# EAGLE board alim (EAGLE 4.16)
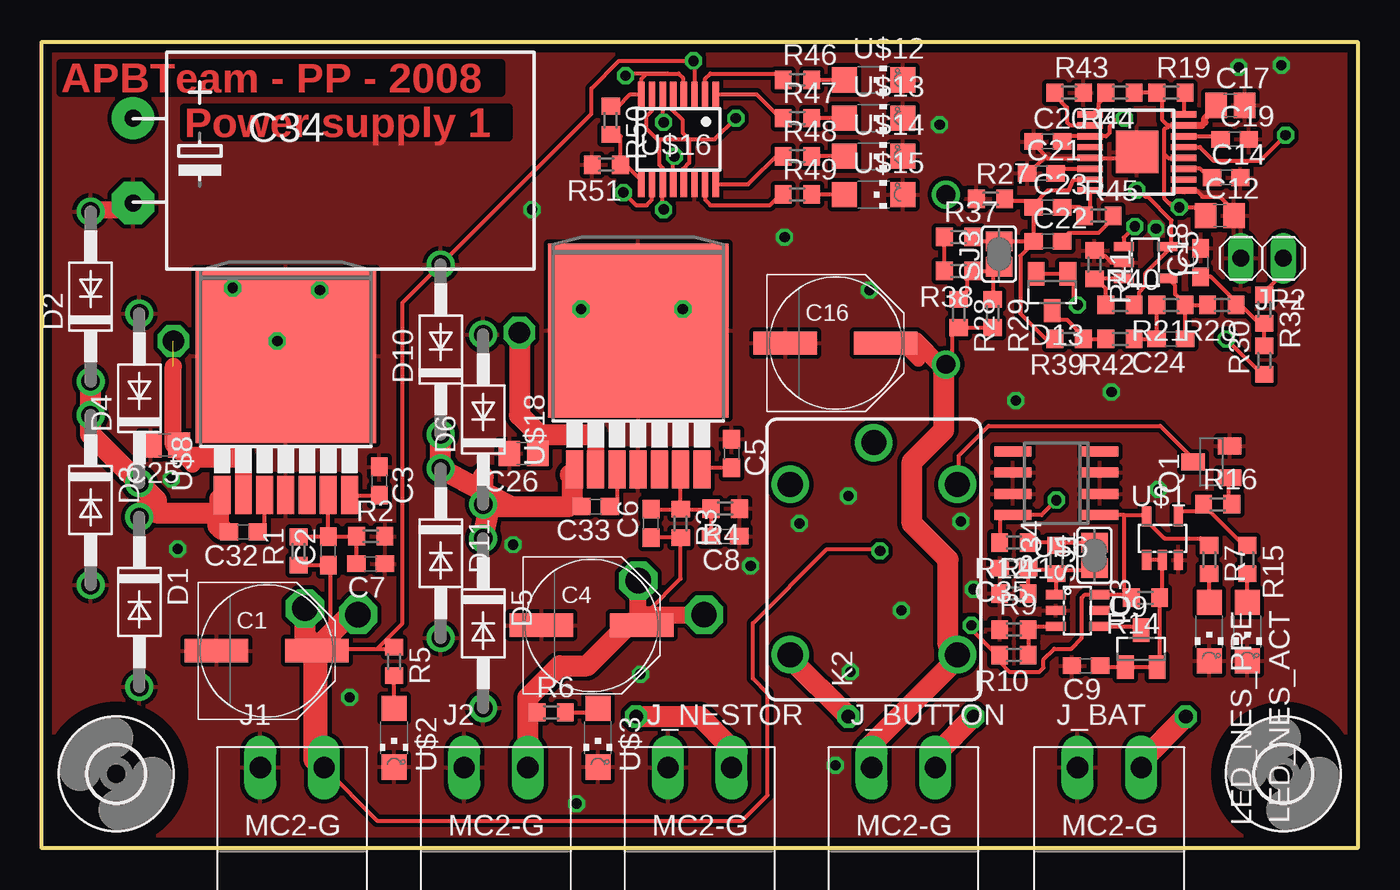
[diagram p0: board, top side]
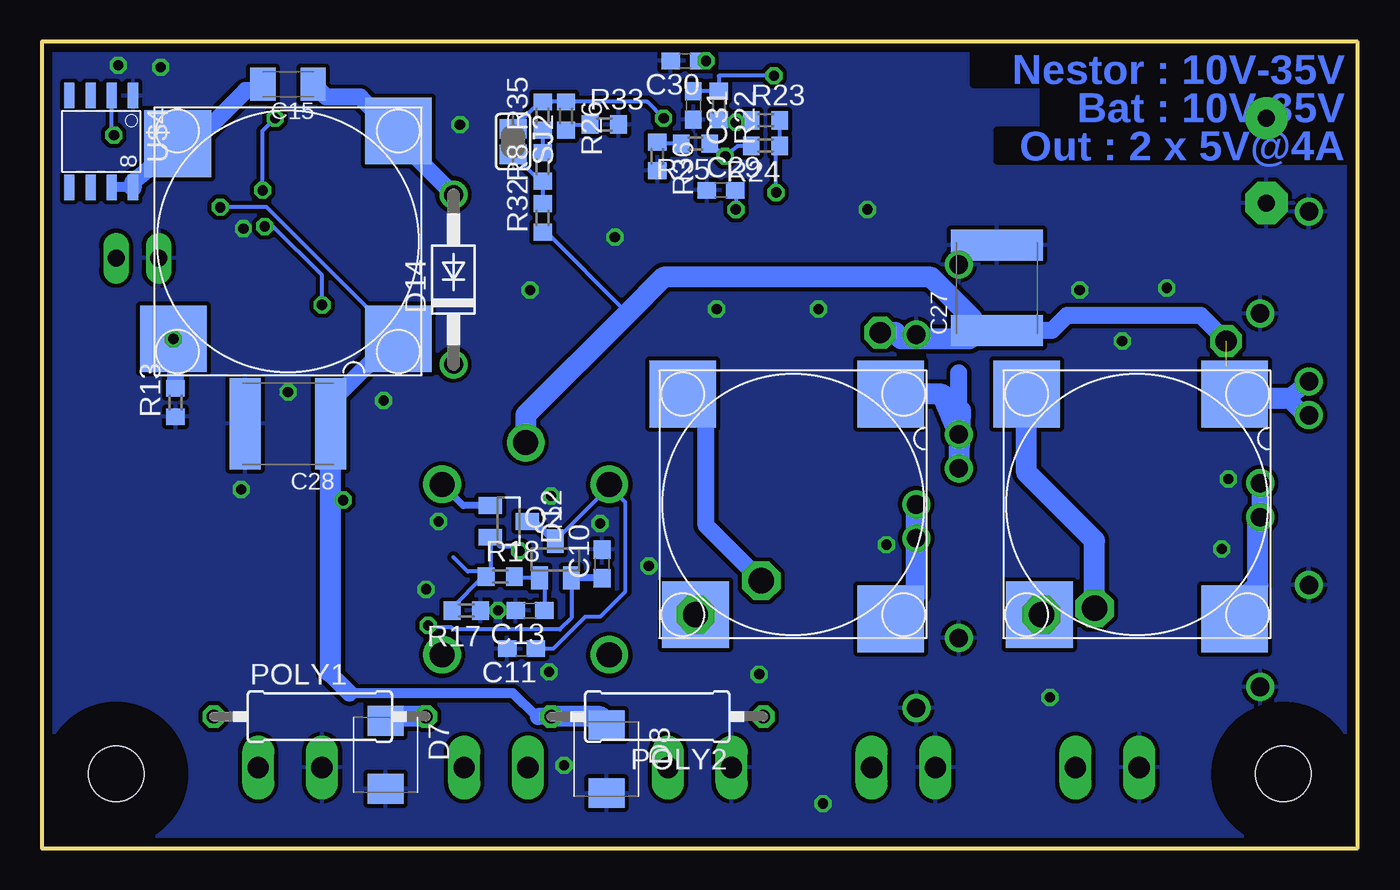
[diagram p1: board, bottom side, seen from below]

Size 78.74 x 48.26 mm. Coordinates in mm from the lower left corner, seen from the top.
Outline: 78.74,0 0,0 0,48.26 78.74,48.26 78.74,0
Copper layers (1*16): Top 0.035mm / dielectric 1.5mm / Bottom 0.035mm
Design rules "10mils": minimum track width 10mil, minimum drill 24mil, track to track 10mil, track to pad 10mil, pad to pad 10mil, via to via 10mil, smd to smd 10mil, copper to edge 20mil, drill to drill 8mil, minimum pad ring 10mil, minimum via ring 8mil, stop-mask expansion 0mil, vias tented up to drill 0mil, thermal gap 10mil

## Footprints (pad centres in the part's own frame; a part is rotated, then mirrored left to right if it is on the bottom)
PANASONIC_E = smd 3.8 x 1.4: + 3,0; - -3,0
C0603 = smd 1.1 x 1: 1 -0.85,0; 2 0.85,0
C0805 = smd 1.3 x 1.5: 1 -0.85,0; 2 0.85,0
C1206K = smd 1.5 x 2: 1 -1.5,0; 2 1.5,0
C2220K = smd 1.85 x 5.5: 1 -2.55,0; 2 2.55,0
E5-13_RADIAL = drill 1.016 pad 2.54 round: + -2.54,0 | drill 1.016 pad 2.54 octagon: - 2.54,0
DO41-10 = drill 1.118 round: A 5.08,0; C -5.08,0
SMBJ = smd 1.78 x 2.16: A 2.04,0; C -2.03,0
SOT23 = smd 1 x 1.4: 1 -0.95,-1.1; 2 0.95,-1.1; 3 0,1.1
3,3 = hole 3.3: 0,0
SOT23-6 = smd 0.55 x 1.2: 1 -0.95,-1.3; 2 0,-1.3; 3 0.95,-1.3; 4 0.95,1.3; 5 0,1.303; 6 -0.95,1.3
SOT23-5 = smd 0.55 x 1.2: 1 -0.95,-1.3; 2 0,-1.3; 3 0.95,-1.3; 4 0.95,1.3; 5 -0.95,1.3
MC2-G = drill 1.27 long: 1 -1.905,0; 2 1.905,0
1X02 = drill 1.016 long: 1 -1.27,0; 2 1.27,0
CQ1 = drill 1.5 round: 1 4.5,-5; 2 4.5,5; C 7,0; NC -5.7,-5; NO -5.7,5
CHIPLED_1206 = smd 1.5 x 1.5: A 0,-1.75; C 0,1.75
0309/12 = drill 0.813 octagon: 1 -6.35,0; 2 6.35,0
SOT23-BEC = smd 1 x 1.4: B -0.95,-1.1; C 0,1.1; E 0.95,-1.1
R0603 = smd 1 x 1.1: 1 -0.85,0; 2 0.85,0
SJ = smd 1.168 x 1.6: 1 -0.762,0; 2 0.762,0
SO-8 = smd 1.524 x 0.61: 1 -2.743,1.27; 2 -2.743,0; 3 -2.743,-1.27; 4 -2.743,-2.54; 5 2.743,-2.54; 6 2.743,-1.27; 7 2.743,0; 8 2.743,1.27
HM76_40 = smd 3.988 x 3.988: P$1 -6.604,5.842; P$2 6.604,-5.842; P$3 -6.604,-6.604; P$4 6.858,5.842
SO08 = smd 0.6 x 2.2: 1 -1.905,-2.6; 2 -0.635,-2.6; 3 0.635,-2.6; 4 1.905,-2.6; 5 1.905,2.6; 6 0.635,2.6; 7 -0.635,2.6; 8 -1.905,2.6
PDSO16 = smd 0.381 x 1.524: P$1 -2.25,-2.8; P$2 -1.6,-2.8; P$3 -0.95,-2.8; P$4 -0.3,-2.8; P$5 0.35,-2.8; P$6 1,-2.8; P$7 1.65,-2.8; P$8 2.3,-2.8; P$9 2.3,2.8; P$10 1.65,2.8; P$11 1,2.8; P$12 0.35,2.8; P$13 -0.3,2.8; P$14 -0.95,2.8; P$15 -1.6,2.8; P$16 -2.25,2.8 | smd 2.54 x 2.54: P$17 0,0
TO263-7 = smd 1.016 x 2.286: 1 -3.81,-5.791; 2 -2.54,-5.791; 3 -1.27,-5.791; 4 0,-5.791; 5 1.27,-5.791; 6 2.54,-5.791; 7 3.81,-5.791 | smd 10.8 x 10.41: 8 0,2.54
QSOP16 = smd 0.381 x 1.524: 1 -2.223,-2.69; 2 -1.587,-2.69; 3 -0.953,-2.69; 4 -0.318,-2.69; 5 0.318,-2.69; 6 0.953,-2.69; 7 1.587,-2.69; 8 2.223,-2.69; 9 2.223,2.69; 10 1.587,2.69; 11 0.953,2.69; 12 0.318,2.69; 13 -0.318,2.69; 14 -0.953,2.69; 15 -1.587,2.69; 16 -2.223,2.69

## Placement (x,y rotation side)
C1  47µ  [PANASONIC_E]  13.46,11.81 0 top
C2  [C0603]  17.14,17.78 90 top
C3  100n  [C0603]  20.19,21.97 270 top
C4  47µ  [PANASONIC_E]  32.89,13.34 0 top
C5  100n  [C0603]  41.27,23.62 270 top
C6  [C0603]  36.45,19.43 90 top
C7  [C0603]  19.68,17.02 180 top
C8  [C0603]  40.89,18.67 180 top
C9  100n  [C0603]  62.48,10.92 180 top
C10  1µ  [C0603]  45.21,17.02 90 bottom
C11  1µ  [C0603]  50.04,11.94 180 bottom
C12  100n/50V  [C0805]  70.48,37.85 0 top
C13  1µ  [C0603]  49.53,14.22 180 bottom
C14  1µ  [C0603]  70.87,40.13 0 top
C15  1µ  [C1206K]  64.01,45.72 180 bottom
C16  22µ/50V  [PANASONIC_E]  47.5,30.23 0 top
C17  100n/50V  [C0805]  71.12,44.45 0 top
C18  100n  [C0603]  69.34,35.05 90 top
C19  100n  [C0603]  71.37,42.42 0 top
C20  100n  [C0603]  60.2,42.29 0 top
C21  10n  [C0603]  59.82,40.39 0 top
C22  200p  [C0603]  60.2,36.32 0 top
C23  20p  [C0603]  60.2,38.35 0 top
C24  22p  [C0603]  67.56,30.48 180 top
C25  100n/50V  [C0805]  7.37,24.13 180 top
C26  100n/50V  [C0805]  28.83,23.62 180 top
C27  10µ/50V  [C2220K]  21.59,33.53 90 bottom
C28  10µ/50V  [C2220K]  64.01,25.4 180 bottom
C29  100n  [C0603]  38.1,39.37 0 bottom
C30  100n  [C0603]  40.26,47.12 180 bottom
C31  100n  [C0603]  39.75,44.45 270 bottom
C32  100n  [C0603]  12.06,18.92 180 top
C33  100n  [C0603]  33.15,20.45 180 top
C34  1000µF  [E5-13_RADIAL]  5.46,41.15 270 top
C35  100n  [C0603]  58.17,16.76 180 top
D1  1N5819  [DO41-10]  5.84,14.73 270 top
D2  1N5819  [DO41-10]  2.92,33.02 90 top
D3  1N5819  [DO41-10]  2.92,20.83 270 top
D4  1N5819  [DO41-10]  5.84,26.92 90 top
D5  1N5819  [DO41-10]  26.42,13.46 270 top
D6  1N5819  [DO41-10]  26.42,25.65 90 top
D7  [SMBJ]  58.17,5.59 270 bottom
D8  [SMBJ]  44.96,5.33 270 bottom
D9  BAS70-05  [SOT23]  65.79,11.94 0 top
D10  1N5819  [DO41-10]  23.88,29.84 90 top
D11  1N5819  [DO41-10]  23.88,17.65 270 top
D12  BAS70-05  [SOT23]  50.8,19.56 270 bottom
D13  BAS70-05  [SOT23]  60.45,33.27 180 top
D14  1N5819  [DO41-10]  54.1,34.04 90 bottom
H1  MOUNT-HOLE3.3  [3,3]  4.45,4.45 90 top
H2  MOUNT-HOLE3.3  [3,3]  74.3,4.45 90 top
IC3  LM331DBV  [SOT23-6]  61.98,14.22 270 top
IC5  AD8515RT  [SOT23-5]  66.04,35.05 270 top
J1  MC2-G  [MC2-G]  14.99,4.83 0 top
J2  MC2-G  [MC2-G]  27.18,4.83 0 top
J_BAT  MC2-G  [MC2-G]  63.88,4.83 0 top
J_BUTTON  MC2-G  [MC2-G]  51.56,4.83 0 top
J_NESTOR  MC2-G  [MC2-G]  39.37,4.83 0 top
JP2  [1X02]  73.03,35.31 180 top
K2  CQ1-12V  [CQ1]  49.78,17.27 90 top
LED_NES_ACT  [CHIPLED_1206]  72.14,12.95 180 top
LED_NES_PRE  [CHIPLED_1206]  69.85,12.95 180 top
POLY1  polyswitch 5A  [0309/12]  62.1,7.87 0 bottom
POLY2  polyswitch 5A  [0309/12]  41.91,7.87 180 bottom
Q1  BC850SMD  [SOT23-BEC]  69.98,23.11 90 top
Q2  BSS84  [SOT23]  48.01,17.27 0 bottom
R1  [R0603]  15.37,17.78 90 top
R2  [R0603]  19.68,18.67 0 top
R3  [R0603]  38.23,19.43 270 top
R4  [R0603]  40.89,20.32 180 top
R5  [R0603]  21.08,11.18 270 top
R6  [R0603]  30.48,8.13 0 top
R7  2,15k  [R0603]  69.85,17.27 270 top
R8  100k  [R0603]  48.77,40.77 90 bottom
R9  100k  [R0603]  58.17,13.08 0 top
R10  47k  [R0603]  58.17,11.56 180 top
R11  100k  [R0603]  58.17,15.24 0 top
R12  215k  [R0603]  58.17,18.29 180 top
R13  0.25  [R0603]  70.74,26.67 90 bottom
R14  100k  [R0603]  66.04,14.99 180 top
R15  2,15k  [R0603]  72.14,17.27 270 top
R16  [R0603]  70.36,20.57 0 top
R17  10k  [R0603]  53.34,14.22 180 bottom
R18  10k  [R0603]  51.31,16.26 0 bottom
R19  1k  [R0603]  67.56,45.21 0 top
R20  100k  [R0603]  70.61,32.51 180 top
R21  220k  [R0603]  67.56,32.51 180 top
R22  4.7k  [R0603]  38.23,44.45 270 bottom
R23  4.7k  [R0603]  35.43,43.56 0 bottom
R24  4.7K  [R0603]  35.43,42.04 180 bottom
R25  10k  [R0603]  39.62,42.16 180 bottom
R26  10k  [R0603]  47.37,43.81 270 bottom
R27  10k  [R0603]  56.77,38.86 0 top
R28  1M  [R0603]  54.86,32 270 top
R29  100k  [R0603]  56.9,32 270 top
R30  1k  [R0603]  73.15,29.21 90 top
R31  2,2k  [R0603]  73.15,32.26 270 top
R32  100k  [R0603]  48.77,37.72 90 bottom
R33  180  [R0603]  45.09,43.31 0 bottom
R34  330k  [R0603]  60.71,17.27 90 top
R35  10k  [R0603]  48.77,43.81 90 bottom
R36  100k  [R0603]  41.91,41.4 270 bottom
R37  100k  [R0603]  54.86,36.58 0 top
R38  10k  [R0603]  54.86,34.54 180 top
R39  1k  [R0603]  61.47,30.48 180 top
R40  1k  [R0603]  64.52,32.51 0 top
R41  1k  [R0603]  62.99,34.92 270 top
R42  100k  [R0603]  64.52,30.48 180 top
R43  66k  [R0603]  61.47,45.21 0 top
R44  32k  [R0603]  64.52,45.21 180 top
R45  100k  [R0603]  63.25,37.85 0 top
R46  2.2k  [R0603]  45.21,45.97 0 top
R47  2.2k  [R0603]  45.21,43.69 0 top
R48  2.2k  [R0603]  45.21,41.4 0 top
R49  2.2k  [R0603]  45.21,39.12 0 top
R50  22k  [R0603]  34.04,43.56 270 top
R51  215k  [R0603]  33.78,40.89 180 top
SJ1  [SJ]  62.99,17.53 90 top
SJ2  [SJ]  50.55,42.29 270 bottom
SJ3  [SJ]  57.28,35.56 90 top
U$1  1G08  [SOT23-5]  67.06,18.54 0 top
U$2  [CHIPLED_1206]  21.08,6.6 180 top
U$3  [CHIPLED_1206]  33.27,6.6 180 top
U$4  DUAL_N_MOS  [SO-8]  74.55,42.29 270 bottom
U$5  HM76_40022  [HM76_40]  13.21,20.57 270 bottom
U$6  LM2931D  [SO08]  60.71,21.84 90 top
U$7  TPS40057PWP  [PDSO16]  65.53,41.66 270 top
U$8  LM2678S  [TO263-7]  14.61,26.92 0 top
U$10  HM76_40022  [HM76_40]  33.78,20.57 270 bottom
U$11  HM76_40  [HM76_40]  64.01,36.32 180 bottom
U$12  [CHIPLED_1206]  49.78,45.97 270 top
U$13  [CHIPLED_1206]  49.78,43.69 270 top
U$14  [CHIPLED_1206]  49.78,41.4 270 top
U$15  [CHIPLED_1206]  49.78,39.12 270 top
U$16  MAX969  [QSOP16]  38.1,42.42 180 top
U$18  LM2678S  [TO263-7]  35.69,28.45 0 top

## Library data of the parts
C1-C35 POLY1 POLY2 R1-R51 = rcl
D1-D14 = diode
H1 H2 = holes
IC3 IC5 U$5-U$8 U$10 U$11 U$18 = robot
J1 J2 J_BAT J_BUTTON J_NESTOR = con-phoenix-381_l
JP2 = pinhead
K2 = relay
LED_NES_ACT LED_NES_PRE U$2 U$3 U$12-U$15 = led
Q1 = transistor-npn
Q2 = transistor-small-signal
SJ1-SJ3 = jumper
U$1 = little-logic
U$4 = transistor-fet
U$16 = maxim-7

## Nets
+5V: C10.1 IC3.6 Q2.2 R7.1 R10.2 R14.2 U$1.5 U$6.1
GND: C1.- C3.1 C4.- C5.1 C7.1 C8.1 C9.2 C10.2 C11.2 C12.2 C13.2 C14.2 C16.- C17.2 C18.2 C19.2 C20.1 C21.1 C25.2 C26.2 C27.2 C28.2 C29.1 C30.2 C31.2 C34.- C35.2 D1.A D2.A D3.A D4.A D5.A D6.A D7.A D8.A D10.A D11.A IC3.2 IC5.2 J1.1 J2.1 J_BAT.1 J_NESTOR.1 JP2.2 LED_NES_ACT.C LED_NES_PRE.C Q1.E R2.2 R4.1 R9.1 R11.1 R13.1 R17.1 R27.1 R33.2 R36.2 R41.1 R43.2 R51.2 U$1.3 U$2.C U$3.C U$4.1 U$6.2 U$6.3 U$6.6 U$6.7 U$7.P$5 U$7.P$9 U$7.P$17 U$8.4 U$8.8 U$12.C U$13.C U$14.C U$15.C U$16.14 U$18.4 U$18.8
N$1: C32.2 D1.C D2.C D3.C D4.C U$5.P$1 U$5.P$4 U$8.1
N$2: D12.1 K2.1 Q1.C
N$3: C2.2 C7.2 R1.2 R2.1 U$8.6
N$4: C6.2 C8.2 R3.1 R4.2 U$18.6
N$5: C5.2 U$18.7
N$6: C3.2 U$8.7
N$7: R15.1 R16.1 U$1.4
N$8: C33.2 D5.C D6.C D10.C D11.C U$10.P$1 U$10.P$4 U$18.1
N$9: R5.2 U$2.A
N$10: R6.2 U$3.A
N$11: LED_NES_PRE.A R7.2
N$12: J_BAT.2 POLY1.1
N$13: J_NESTOR.2 POLY2.1
N$14: IC3.3 R9.2 R10.1
N$15: C35.1 IC3.1 R11.2 R34.1 SJ1.1
N$16: C9.1 D9.1 D9.2 R14.1 U$1.1 U$1.2
N$17: D9.3 IC3.4
N$18: LED_NES_ACT.A R15.2
N$19: C13.1 Q2.1 R18.2
N$20: R22.2 R23.1 U$16.6
N$21: U$4.2 U$7.P$13
N$22: D7.C J_BUTTON.2 POLY1.2
N$23: Q1.B R16.2
N$24: C11.1 D12.3 K2.2 Q2.3
N$25: C19.1 U$7.P$14
N$26: C14.1 U$7.P$11
N$27: R46.1 U$16.2
N$28: R19.2 U$7.P$16
N$29: R23.2 R24.1 U$16.10
N$30: R24.2 R25.1 U$16.12
N$31: R50.2 R51.1 U$16.9
N$32: C29.2 R26.1 R35.2 SJ2.1 U$16.5 U$16.7 U$16.11 U$16.13
N$33: R8.2 R35.1
N$34: C15.2 U$4.7 U$4.8 U$11.P$2
N$35: C15.1 D14.A U$11.P$3
N$36: R28.1 R29.1 R38.1 SJ3.1
N$37: R47.1 U$16.1
N$40: R13.2 R30.1 U$11.P$4
N$41: C18.1 R20.1 R30.2 R31.2
N$42: R12.1 R34.2 SJ1.2
N$43: R8.1 R32.2 SJ2.2
N$44: C32.1 U$8.3
N$45: R26.2 R33.1
N$46: R25.2 R36.1
N$47: R37.1 R38.2
N$48: D13.1 D13.2 IC5.1
N$49: D13.3 R39.1 R42.2
N$50: C22.1 C23.1 R27.2 R37.2 R39.2 SJ3.2 U$7.P$7
N$51: C24.1 IC5.4 R20.2 R21.1
N$52: IC5.3 R40.1 R41.2
N$53: C24.2 R21.2 R42.1
N$54: JP2.1 R31.1
N$55: R48.1 U$16.16
N$56: C21.2 U$7.P$6
N$57: R43.1 U$7.P$2
N$58: R44.2 U$7.P$1
N$59: C23.2 R45.1 U$7.P$8
N$60: C22.2 R45.2
N$61: R49.1 U$16.15
N$62: R46.2 U$12.A
N$63: R47.2 U$13.A
N$64: R48.2 U$14.A
N$65: R49.2 U$15.A
N$66: C33.1 U$18.3
P5V_ALIM: C20.2 IC5.5 R40.2 U$7.P$3
P5V_DIRTY: C4.+ C6.1 J2.2 R3.2 R6.1 U$10.P$2 U$10.P$3
P5V_NUM: C1.+ C2.1 C30.1 D12.2 J1.2 R1.1 R5.1 R17.2 R18.1 U$5.P$2 U$5.P$3 U$16.3
V_ALIM: C25.1 C26.1 C27.1 K2.C R32.1 U$8.2 U$18.2
V_BAT: C16.+ D14.C J_BUTTON.1 K2.NC R28.2 R29.2
V_NESTOR: C12.1 C17.1 C28.1 D8.C K2.NO POLY2.2 R12.2 R19.1 R44.1 U$6.8 U$7.P$12 U$7.P$15 U$11.P$1
VREF_1V2: C31.1 R22.1 R50.1 U$16.4 U$16.8

## Tracks (layer width: path | path; a pad name or v marks a point on that pad's centre or on a via)
+5V  (via drill 0.61)
  Top 0.254: 64.77,19.94 66.17,19.94 66.11,19.88 U$1.5 66.11,19.75 66.04,19.68 67.18,18.54 69.34,18.54 69.76,18.12 R7.1 | IC3.6 65.09,15.17 65.19,15.07 R14.2 65.02,14.99 64.77,15.37 64.77,19.94 | IC3.6 63.69,15.17 | 64.77,19.94 U$6.1 | IC3.6 62.42,15.17 62.23,14.99 62.23,12.57 61.59,11.94 60.58,11.94 59.94,11.3 59.94,10.79 59.69,10.54 57.91,10.54 57.32,11.14 R10.2 57.15,11.56 55.63,13.08 v55.63,13.34
  Bottom 0.254: Q2.2 47.06,13.78 47.75,13.08 54.1,13.08 54.23,13.21 55.63,13.21 v55.63,13.34
  Bottom 0.406: 47.12,16.17 47.12,16.38 | 47.12,16.17 Q2.2 | C10.1 47.12,16.17
GND  (via drill 0.61)
  Top 0.254: 65.28,41.66 64.77,41.66 64.77,41.4 | U$7.P$17 65.18,41.31 U$7.P$5 60.17,41.31 60.07,41.4 | IC5.2 64.01,35.05 63.63,35.43 63.37,35.43 62.99,35.81 R41.1 | C20.1 59.35,42.12 60.07,41.4 | C21.1 59.35,40.6 59.31,40.64 60.07,41.4 | U$7.P$9 69.1,39.36 69.47,38.99 70.48,38.99 71.12,38.35 71.08,38.06 C12.2
  Top 1.016: 3.05,38.23 5.08,38.23 C34.-
  other vias: 74.17,46.86 66.67,37.08 55.75,15.49 51.44,14.22 45.34,19.43 48.26,21.08 47.5,4.95 32,2.67 18.41,9.02 11.43,33.53 16.64,33.4 14.1,30.35 32.26,32.26 38.35,32.26 7.75,22.1 8.13,17.91 42.42,16.89 64.01,27.3 66.8,21.46 58.29,26.8 54.99,19.56 53.72,43.31 44.45,36.58 29.34,38.23 71.63,46.74 49.53,33.4 35.81,10.41 28.19,18.16 48.39,10.54
  pour Bottom (isolate 0.254): 0.25,0.25 0.25,48.01 78.49,48.01 78.49,0.25
  pour Top (isolate 0.254): 0.51,0.51 0.51,47.75 78.23,47.75 78.23,0.51
N$1
  Top 0.254: 11.21,19.01 C32.2 11.21,18.63 10.79,19.05
  Top 1.016: U$8.1 10.72,21.13 10.54,20.95 10.54,20.07
  Top 1.27: 10.79,19.05 10.54,19.3 10.54,20.07 6.86,20.07 6.86,20.45 | D1.C 5.71,19.81 6.35,20.45 6.86,20.45 | 6.86,20.45 6.86,20.83 D4.C 2.92,24.77 D3.C D2.C
  Bottom 1.016: D3.C 3.3,26.04 | D2.C 4.19,26.92 3.3,26.04 | 3.3,26.04 3.17,26.16 | D1.C 5.84,19.68 | D1.C D4.C | D1.C 5.71,19.81
  Bottom 1.27: U$5.P$4 7.37,14.35 5.97,15.75 5.97,19.68 D1.C | 4.19,26.92 6.86,26.92 6.99,27.05 U$5.P$1
N$2
  Top 0.254: Q1.C 68.88,23.32 66.93,25.27 56.64,25.27 54.86,23.5 54.86,22.1 54.78,22.02 54.78,21.8 54.81,21.77 | 54.81,21.77 54.86,21.72 | K2.1 54.81,21.77
  Bottom 0.254: 54.82,21.76 54.86,21.72 | K2.1 54.82,21.76 | K2.1 54.81,21.77 54.82,21.76
  Bottom 0.406: D12.1 53.53,20.51 K2.1
N$3
  Top 0.254: C2.2 R1.2 | C2.2 U$8.6 | C2.2 18.88,18.63 18.92,18.67 | 18.92,18.67 R2.1 | C7.2 18.84,18.58 18.92,18.67
N$4
  Top 0.254: 38.23,20.32 38.23,20.45 38.06,20.28 C6.2 | 38.23,20.32 R3.1 39.97,20.28 40.01,20.32 R4.2 40.04,20.23 40.01,20.19 40.04,20.15 C8.2 | 38.23,20.32 U$18.6
N$5
  Top 0.254: U$18.7 39.45,22.66 39.37,22.73 39.41,22.77 C5.2
N$6
  Top 0.254: U$8.7 18.41,21.21 18.5,21.12 C3.2
N$7
  Top 0.254: U$1.4 68.01,20 68.2,20.19 69.09,20.19 69.47,20.57 R16.1 69.51,20.54 71.92,18.12 R15.1
N$8
  Top 0.254: 31.37,20.45 31.37,20.57 31.5,20.45 C33.2
  Top 1.016: U$18.1 31.88,22.61 31.62,22.35
  Top 1.27: 31.62,22.35 31.75,22.35 31.75,20.7 31.5,20.45 31.37,20.45 28.19,20.45 | D6.C 26.42,22.23 | 28.19,20.45 26.8,20.45 D5.C | 28.19,20.45 28.07,20.45 D11.C D10.C
  Bottom 1.016: 26.42,19.94 D5.C | U$10.P$4 28.7,13.72 | D10.C 23.88,28.45
  Bottom 1.27: 26.42,19.94 26.42,15.24 U$10.P$4 | D5.C D6.C | D11.C 23.75,26.16 23.88,26.29 24.89,27.18 | D10.C 24.89,27.18 | 24.89,27.18 U$10.P$1
N$9
  Top 0.254: R5.2 21.21,10.41 21.08,10.29 U$2.A
N$10
  Top 0.254: 33.27,8.13 U$3.A | R6.2 33.27,8.13 | 33.27,8.13 33.4,8
N$11
  Top 0.254: LED_NES_PRE.A R7.2
N$12
  Top 1.27: POLY1.1 65.79,5.21 J_BAT.2
N$13
  Top 1.27: POLY2.1 39.37,7.87 41.15,6.1 41.15,4.95 J_NESTOR.2
N$14
  Top 0.254: IC3.3 59.25,13.27 59.18,13.21 59.05,13.21 | R10.1 59.02,11.21 59.05,11.18 59.05,13.21 | 59.05,13.21 R9.2
N$15
  Top 0.254: 60.58,16.64 59.18,16.64 | 60.58,16.64 62.87,16.64 SJ1.1 | 59.18,16.64 C35.1 | R11.2 59.02,16.47 59.18,16.64 | IC3.1 60.65,15.17 60.58,15.24 60.71,15.37 R34.1 60.71,16.51 60.58,16.64
N$16
  Top 0.254: U$1.1 67.03,17.24 67.06,17.27 U$1.2 67.06,15.11 66.93,14.99 R14.1 66.89,11.01 66.74,10.86 D9.2 D9.1 | C9.1 63.37,10.92 63.46,10.84 | 63.46,10.84 D9.1 | D9.1 64.84,10.86 64.77,10.92 64.69,10.84 63.46,10.84
N$17
  Top 0.254: D9.3 65.79,12.95 65.47,13.27 IC3.4
N$18
  Top 0.254: LED_NES_ACT.A R15.2
N$19
  Bottom 0.254: R18.2 50.46,16.17 50.42,16.13 50.38,16.17 Q2.1 48.96,15.81 48.64,15.49 48.64,14.35 48.51,14.22 C13.1
N$20  (via drill 0.61)
  Top 0.254: U$16.6 37.15,43.62 v37.21,43.43
  Bottom 0.254: R23.1 36.45,43.56 36.58,43.43 v37.21,43.43 37.59,43.43 38.1,43.94 38.1,43.69 38.23,43.56 R22.2
N$21  (via drill 0.61)
  Top 0.254: U$7.P$13 69.3,41.96 70.1,41.15 72.9,41.15 v74.42,42.67
  Bottom 0.254: U$4.2 74.55,42.93 74.42,42.8 v74.42,42.67
N$22
  Top 1.27: POLY1.2 53.59,5.71 53.59,5.08 53.47,4.95 J_BUTTON.2
  Bottom 1.27: D7.C 58.04,7.62 57.78,7.87 POLY1.2
N$23
  Top 0.254: R16.2 71.21,20.74 70.99,20.95 70.99,21.97 70.8,22.16 | 70.8,22.16 70.74,22.23 | Q1.B 70.8,22.16
N$24
  Bottom 0.254: C11.1 48.13,11.94 46.23,13.84 45.34,13.84 43.81,15.37 43.81,20.7 44.83,21.72 | Q2.3 48.01,18.41 44.83,21.59 44.83,21.72 | K2.2 44.83,21.72
  Bottom 0.406: Q2.3 48.22,18.5 49.15,19.43 49.7,19.47 D12.3
N$25
  Top 0.254: C19.1 70.48,42.42 70.3,42.61 U$7.P$14
N$26
  Top 0.254: C14.1 69.85,40.13 69.33,40.66 U$7.P$11
N$27
  Top 0.254: U$16.2 39.69,46.04 40.01,46.35 44.07,46.35 44.36,46.06 R46.1
N$28
  Top 0.254: R19.2 68.41,45.12 68.45,45.09 68.33,44.96 U$7.P$16
N$29  (via drill 0.61)
  Top 0.254: U$16.10 36.51,38.8 36.2,38.48 35.56,38.48 v34.8,39.24
  Bottom 0.254: R23.2 34.67,43.56 34.58,43.47 R24.1 34.58,42 34.8,41.78 v34.8,39.24
N$30  (via drill 0.61)
  Top 0.254: U$16.12 37.78,41.21 v37.85,41.4
  Bottom 0.254: R25.1 38.99,42.42 v37.85,41.4 37.08,42.04 R24.2
N$31
  Top 0.254: R50.2 34.46,42.71 34.54,42.67 34.63,42.58 R51.1 34.92,40.89 35.88,39.94 U$16.9
N$32  (via drill 0.61)
  Top 0.254: U$16.5 37.78,44.77 37.85,44.7 37.72,44.58 37.72,44.2 38.35,43.56 38.35,42.8 38.73,42.42 | v37.21,38.23 37.15,38.16 U$16.11 37.15,40.7 36.96,40.89 36.96,42.42 | U$16.7 36.51,44.13 36.2,43.81 36.2,43.05 36.96,42.29 36.96,42.42 | 38.73,42.42 38.73,41.02 38.35,40.64 38.35,40.01 38.48,39.88 38.42,39.81 U$16.13 | v41.53,43.69 40.26,42.42 38.73,42.42 | 36.96,42.42 38.73,42.42
  Bottom 0.254: C29.2 37.21,39.37 v37.21,38.23 | SJ2.1 48.93,44.66 R35.2 48.77,44.83 48.6,44.66 R26.1 42.51,44.66 v41.53,43.69
N$33
  Bottom 0.254: R35.1 R8.2
N$34
  Bottom 0.61: U$4.7 73.36,39.55 73.28,39.5
  Bottom 1.016: C15.2 65.41,45.72 65.79,45.34 66.55,45.34 69.72,42.16 U$11.P$2 70.61,42.04 73.28,39.88 73.28,39.5 U$4.8
N$35
  Bottom 1.016: C15.1 62.48,45.72 61.72,44.96 59.69,44.96 57.66,42.93 U$11.P$3 57.53,42.8 56.52,41.78 56.52,41.53 D14.A
N$36
  Top 0.254: SJ3.1 57.4,34.67 57.28,34.54 56.9,34.54 | 56.9,34.54 R38.1 55.71,34.51 55.37,34.16 55.37,33.4 54.86,32.89 R28.1 | 56.9,34.54 56.9,34.67 | 56.9,34.54 R29.1
N$37
  Top 0.254: R47.1 44.2,43.69 42.78,45.11 U$16.1
N$40  (via drill 0.61)
  Top 0.254: R30.1 72.99,28.36 U$11.P$4
  Bottom 0.254: U$11.P$4 70.74,30.48 70.36,30.1 70.48,30.1 U$11.P$4
  Bottom 1.016: 70.48,30.1 70.61,30.1 70.87,29.84 70.74,29.72 R13.2
  other vias: 70.87,30.48
N$41
  Top 0.254: C18.1 69.94,34.2 71.46,32.68 R20.1 71.46,32.42 71.84,32.42 72.86,31.41 R31.2 R30.2
N$42
  Top 0.254: R12.1 60.58,18.29 60.71,18.16 R34.2 60.79,18.12 60.96,18.29 SJ1.2
N$43
  Bottom 0.254: SJ2.2 48.93,39.92 R8.1 R32.2 48.77,38.48
N$44
  Top 0.254: C32.1 12.91,19.01 13.34,19.43 U$8.3
N$45
  Bottom 0.254: R26.2 47.37,43.05 47.12,43.31 R33.1
N$46
  Bottom 0.254: R36.1 41.87,42.25 41.78,42.16 R25.2
N$47
  Top 0.254: R38.2 54.01,34.46 | 54.01,34.46 R37.1 | 54.01,34.46 53.98,34.42
N$48  (via drill 0.61)
  Top 0.254: D13.2 D13.1 61.42,34.37 61.47,34.42 61.72,34.16 61.72,32.77 v61.98,32.51 | IC5.1 64.74,36.55 v65.41,37.21
  Bottom 0.254: v65.41,37.21 64.9,37.21 61.98,34.29 v61.98,32.51
N$49
  Top 0.254: R42.2 R39.1 62.32,30.65 61.34,31.62 60.96,31.62 60.45,32.13 | 60.45,32.13 60.45,32 60.58,31.88 | D13.3 60.45,32.13
N$50
  Top 0.254: U$7.P$7 61.72,40.01 61.47,39.37 60.2,39.37 59.35,38.52 C23.1 | C22.1 59.35,36.41 59.31,36.45 59.35,36.49 C23.1 | R27.2 57.66,38.86 57.78,38.73 58.8,38.73 59.18,38.35 C23.1 | C22.1 SJ3.2 56.01,36.32 55.75,36.58 R37.2 | R39.2 60.07,30.48 58.55,32 58.55,35.43 59.44,36.32 C22.1
N$51
  Top 0.254: IC5.4 67.37,34.1 67.82,33.66 67.82,33.15 68.41,32.55 R21.1 68.45,32.51 | 68.45,32.51 R20.2 | C24.1 68.41,32.47 68.45,32.51
N$52
  Top 0.254: IC5.3 63.43,34.1 63.08,34.46 R41.2 62.99,34.16 63.67,33.49 R40.1
N$53
  Top 0.254: 66.71,32.55 R21.2 | 66.71,32.55 C24.2 R42.1 | 66.71,32.55 66.8,32.64
N$54
  Top 0.254: R31.1 73.15,33.27 74.3,34.42 JP2.1
N$55
  Top 0.254: R48.1 44.36,41.49 44.2,41.66 42.27,39.73 U$16.16
N$56
  Top 0.254: C21.2 60.83,40.39 61.1,40.66 U$7.P$6
N$57
  Top 0.254: U$7.P$2 61.52,43.26 61.34,43.43 61.34,44.32 60.58,45.09 60.62,45.12 R43.1
N$58
  Top 0.254: U$7.P$1 62.83,43.91 63.25,44.32 63.25,44.58 63.75,45.09 63.67,45.17 R44.2
N$59
  Top 0.254: U$7.P$8 62.73,38.22 62.48,37.97 | 62.48,37.97 62.36,37.85 R45.1 62.4,37.88 62.48,37.97 | C23.2 62.1,38.35 62.48,37.97
N$60
  Top 0.254: R45.2 64.1,37.68 63.25,36.83 61.47,36.83 61.05,36.41 C22.2
N$61
  Top 0.254: U$16.15 39.69,38.8 40.01,38.48 43.56,38.48 44.2,39.12 R49.1
N$62
  Top 0.254: U$12.A R46.2
N$63
  Top 0.254: U$13.A R47.2
N$64
  Top 0.254: U$14.A R48.2
N$65
  Top 0.254: U$15.A R49.2
N$66
  Top 0.254: C33.1 34.04,20.32 34.42,20.7 U$18.3
P5V_ALIM  (via drill 0.61)
  Top 0.254: C20.2 61.09,42.29 61.4,42.61 U$7.P$3 63.69,42.61 63.88,42.8 63.88,43.18 64.39,43.69 v64.77,43.69 | R40.2 65.37,32.73 65.66,33.02 65.66,33.27 66.04,33.66 66.04,34.42 67.56,35.94 IC5.5 67.44,35.94 67.59,36.1 67.59,37.56 66.17,38.99 66.04,38.99 65.53,39.5 v65.53,39.37
  Bottom 0.254: v65.53,39.37 65.53,42.93 v64.77,43.69
P5V_DIRTY  (via drill 1.52)
  Top 0.254: 36.32,13.97 36.32,14.22 38.23,16.13 R3.2 38.23,18.67 38.14,18.58 C6.1 | 28.96,8.13 29.08,8.13 R6.1
  Top 1.016: v35.69,16 35.69,13.34 35.26,13.41 C4.+ 36.07,13.34 36.07,13.97 36.32,13.97 U$10.P$2
  Top 1.27: J2.2 29.08,8.13 29.08,9.02 30.99,10.92 32.64,10.92 35.18,13.46 35.23,13.41 35.26,13.41
  Bottom 1.016: U$10.P$3 38.99,25.78 38.99,19.3 v35.69,16
  other vias: 39.62,13.97
P5V_NUM  (via drill 0.61, 1.52)
  Top 0.254: U$16.3 39.05,47.05 v38.99,47.12 34.54,47.12 32.89,45.47 32.89,43.94 21.59,32.64 21.59,13.46 20.07,11.94 | 16.51,11.94 20.07,11.94 | 14.99,12.06 16.13,12.06 16.38,11.81 16.46,11.89 C1.+ 16.46,11.86 16.51,11.81 17.27,12.57 17.27,16.76 17.14,16.89 C2.1 15.41,16.93 15.37,16.89 R1.1 | J1.2 20.07,1.65 41.91,1.65 43.43,3.17 43.43,9.27 42.55,10.16 42.55,13.46 46.99,17.91 49.78,17.91 v50.16,17.78 | R5.1 21.21,12.06 21.08,11.94 20.07,11.94
  Top 1.27: v15.75,14.35 15.75,12.7 16.51,11.94 C1.+ 16.38,11.94 18.41,13.97 v18.92,13.97
  Top 1.422: 16.38,11.81 16.38,5.33 J1.2
  Bottom 0.254: 39.12,46.99 39.24,46.86 | 39.12,46.99 C30.1 | v38.99,47.12 39.12,46.99 | 51.9,16.55 D12.2 51.88,18.61 51.31,18.03 50.16,18.03 v50.16,17.78 | 51.9,16.55 52.16,16.3 R18.1 52.32,16.26 54.19,14.39 R17.2 | 51.9,16.55 53.26,16.55 54.1,17.4
  Bottom 1.27: U$5.P$3 19.81,22.48 15.75,18.41 v15.75,14.35 | v18.92,13.97 U$5.P$2
V_ALIM  (via drill 1.27)  (1 unrouted)
  Top 0.254: 29.59,24.89 29.68,24.98 | 29.68,24.98 C26.1 | 29.68,24.98 29.72,25.02
  Top 0.61: 9.02,23.37 C25.1
  Top 1.016: U$8.2 12.06,23.37 11.94,23.37 | 7.87,28.83 7.87,24.13 9.02,22.99 9.02,23.37 | U$18.2 33.15,24.77 33.02,24.77
  Top 1.27: 11.94,23.37 9.02,23.37 | 33.02,24.77 29.72,24.77 29.59,24.89 28.57,25.91 v28.57,30.86
  Bottom 0.254: R32.1 48.73,36.87 48.64,36.96 43.69,32
  Bottom 1.016: C27.1 18.3,30.98 17.4,31.88 9.4,31.88 v7.87,30.35
  Bottom 1.27: v28.57,30.86 27.69,30.86 27.3,30.48 23.24,30.48 22.73,30.99 | C27.1 22.73,30.99 | 22.73,30.99 23.11,31.75 25.53,34.16 41.53,34.16 43.69,32 49.78,25.91 K2.C
V_BAT
  Top 0.254: 56.98,31.15 R29.2 | 56.98,31.15 R28.2 54.78,31.15 54.48,30.86 54.48,29.46 54.1,29.08 D14.C | 56.98,31.15 57.02,31.11 | C16.+ 51.44,30.23 51.56,30.23 52.07,29.72
  Top 0.813: 51.44,30.23 52.45,29.21
  Top 1.016: 53.98,28.96 53.72,28.96 52.32,30.35 50.55,30.35 50.42,30.23 C16.+
  Top 1.27: J_BUTTON.1 49.66,6.22 54.78,11.35 K2.NC 54.78,11.64 54.23,12.19 54.23,17.27 52.07,19.43 52.07,23.11 53.98,25.02 53.98,28.96 D14.C
V_NESTOR  (via drill 0.61)
  Top 0.254: 67.44,43.26 67.36,43.26 67.06,43.56 67.06,44.83 66.67,45.21 | 67.44,43.26 U$7.P$15 | U$7.P$12 67.41,41.31 67.18,41.53 | 67.44,43.26 67.44,43.18 67.18,43.05 67.18,41.53 | 66.67,45.21 R19.1 | 66.67,45.21 R44.1 | 67.18,41.53 67.18,38.86 67.44,38.61 | C12.1 69.38,37.93 68.96,38.35 67.69,38.35 67.44,38.61 | v68.07,38.35 67.44,38.61 | v60.71,20.83 59.82,19.94 U$6.8 57.4,19.94 57.47,19.88 | R12.2 57.32,19.72 57.47,19.88 | 57.47,19.88 57.53,19.94
  Top 0.406: U$7.P$15 69.42,43.26 69.6,43.43 69.6,43.69 70.27,44.36 C17.1
  Top 1.27: K2.NO 44.78,11.51 44.7,11.43 POLY2.2
  Bottom 0.254: v68.07,38.35 65.28,38.35 U$11.P$1 | 61.46,20.95 61.34,20.95 61.21,20.83 v60.71,20.83
  Bottom 0.61: 49.02,7.87 49.15,7.87 50.55,9.27 60.33,9.27
  Bottom 1.016: U$11.P$1 57.66,30.48 61.09,27.05 61.09,26.04 61.47,25.65 61.46,25.64 C28.1 | POLY2.2 49.02,7.87 | 61.46,10.53 61.46,10.42 61.47,10.41 60.33,9.27
  Bottom 1.27: 61.46,10.53 61.46,20.95 C28.1 | D8.C 44.96,7.49 45.34,7.87 POLY2.2
VREF_1V2  (via drill 0.61)
  Top 0.254: 34.42,44.45 R50.1 34.51,44.41 35.2,45.11 U$16.8 35.88,46.04 36.2,46.35 37.47,46.35 | 37.47,46.35 38.1,46.35 38.35,46.1 38.35,45.34 38.42,45.28 U$16.4 | 37.47,46.35 35.31,46.35 35.18,46.23 v34.92,46.23
  Bottom 0.254: 38.23,45.34 38.23,46.23 v34.92,46.23 | 38.23,45.34 R22.1 | C31.1 38.27,45.3 38.23,45.34

## Text on the board
Top: APBTeam - PP - 2008 | Power supply 1
Bottom: Nestor : 10V-35V | Bat : 10V-35V | Out : 2 x 5V@4A